# EAGLE board PCB-AAP-Robot-Schema pcb (EAGLE 9.2.2)
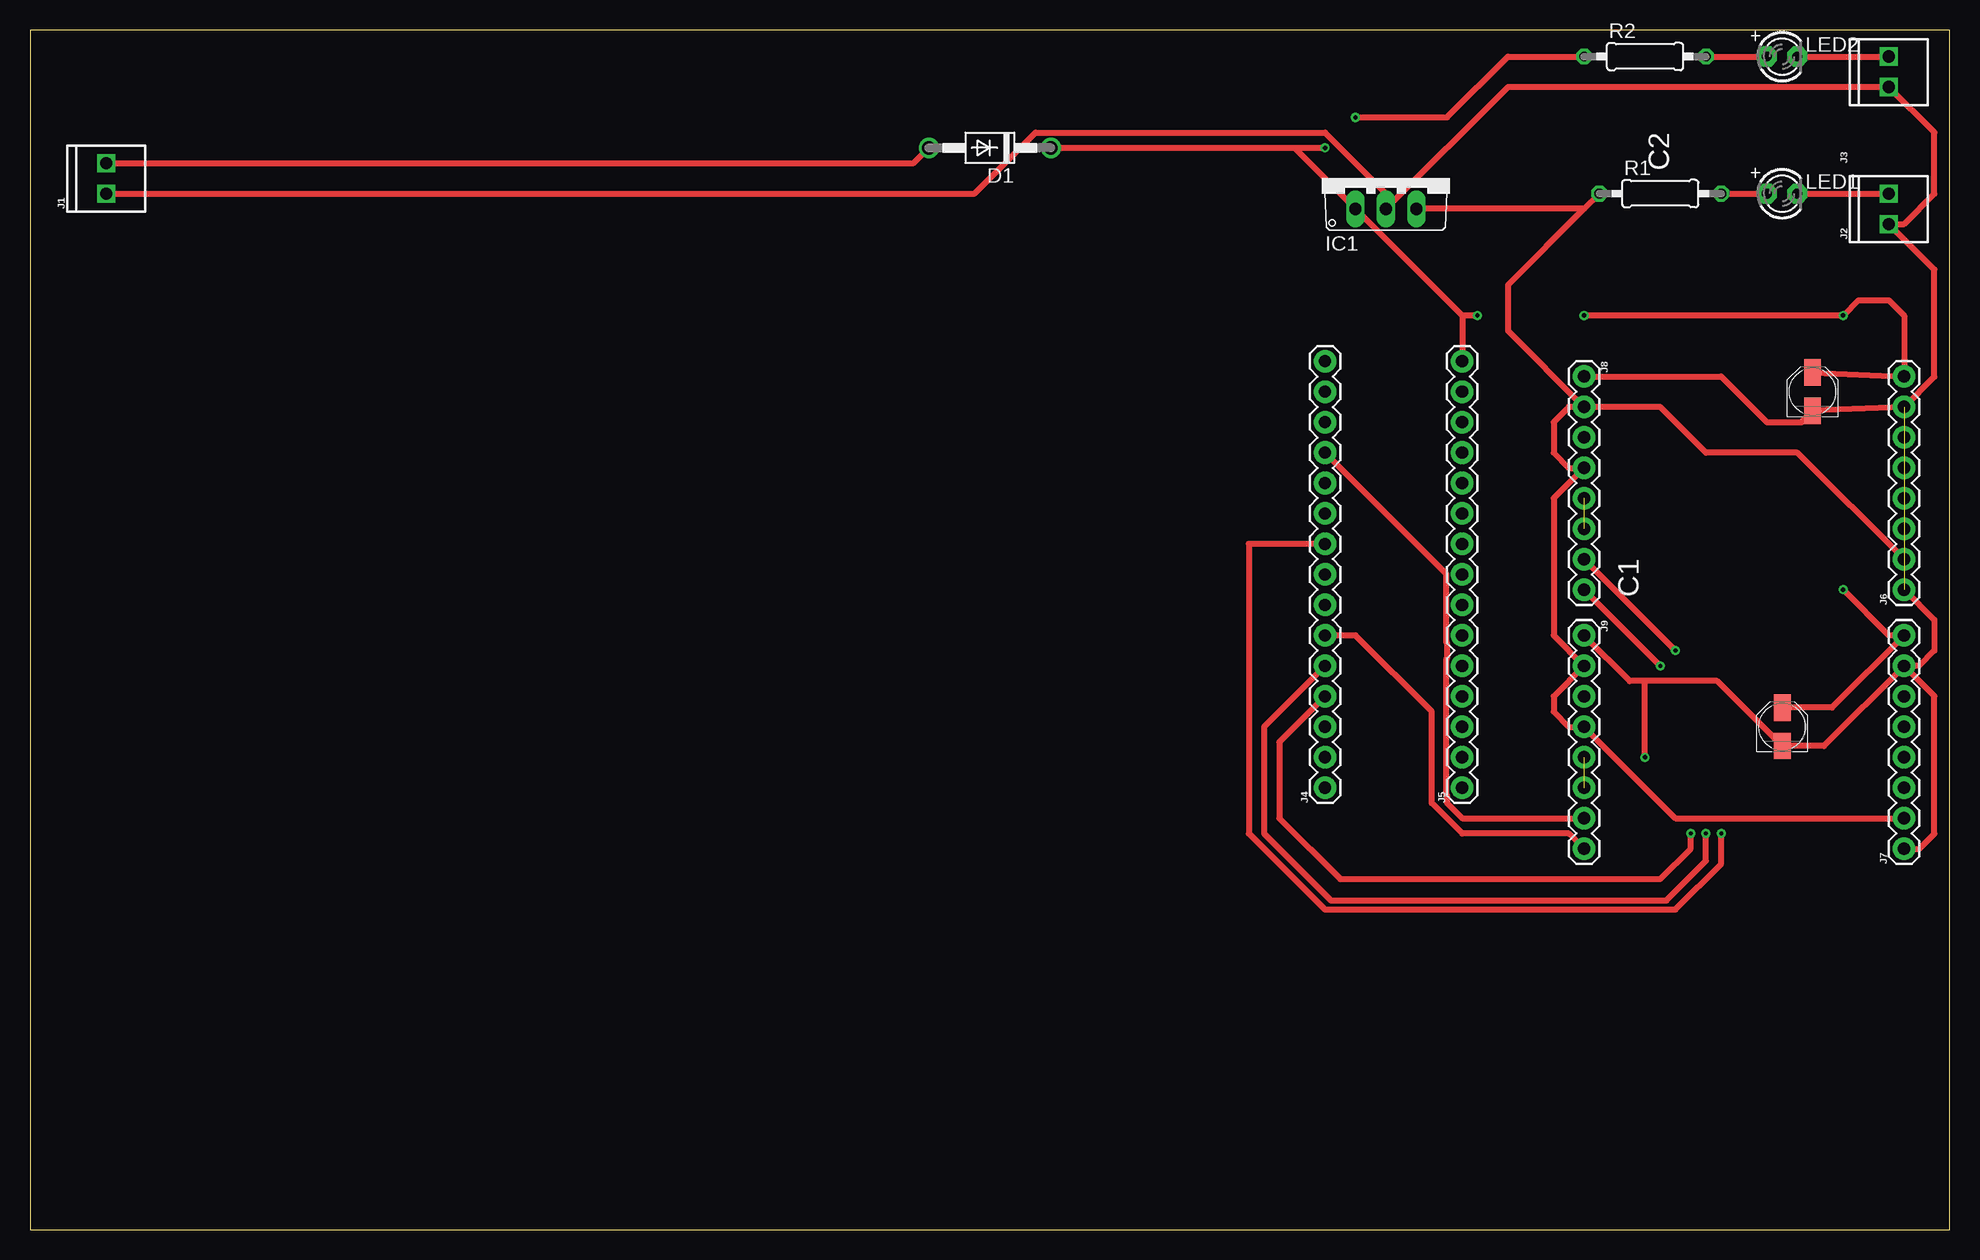
[diagram p0: board, top side]
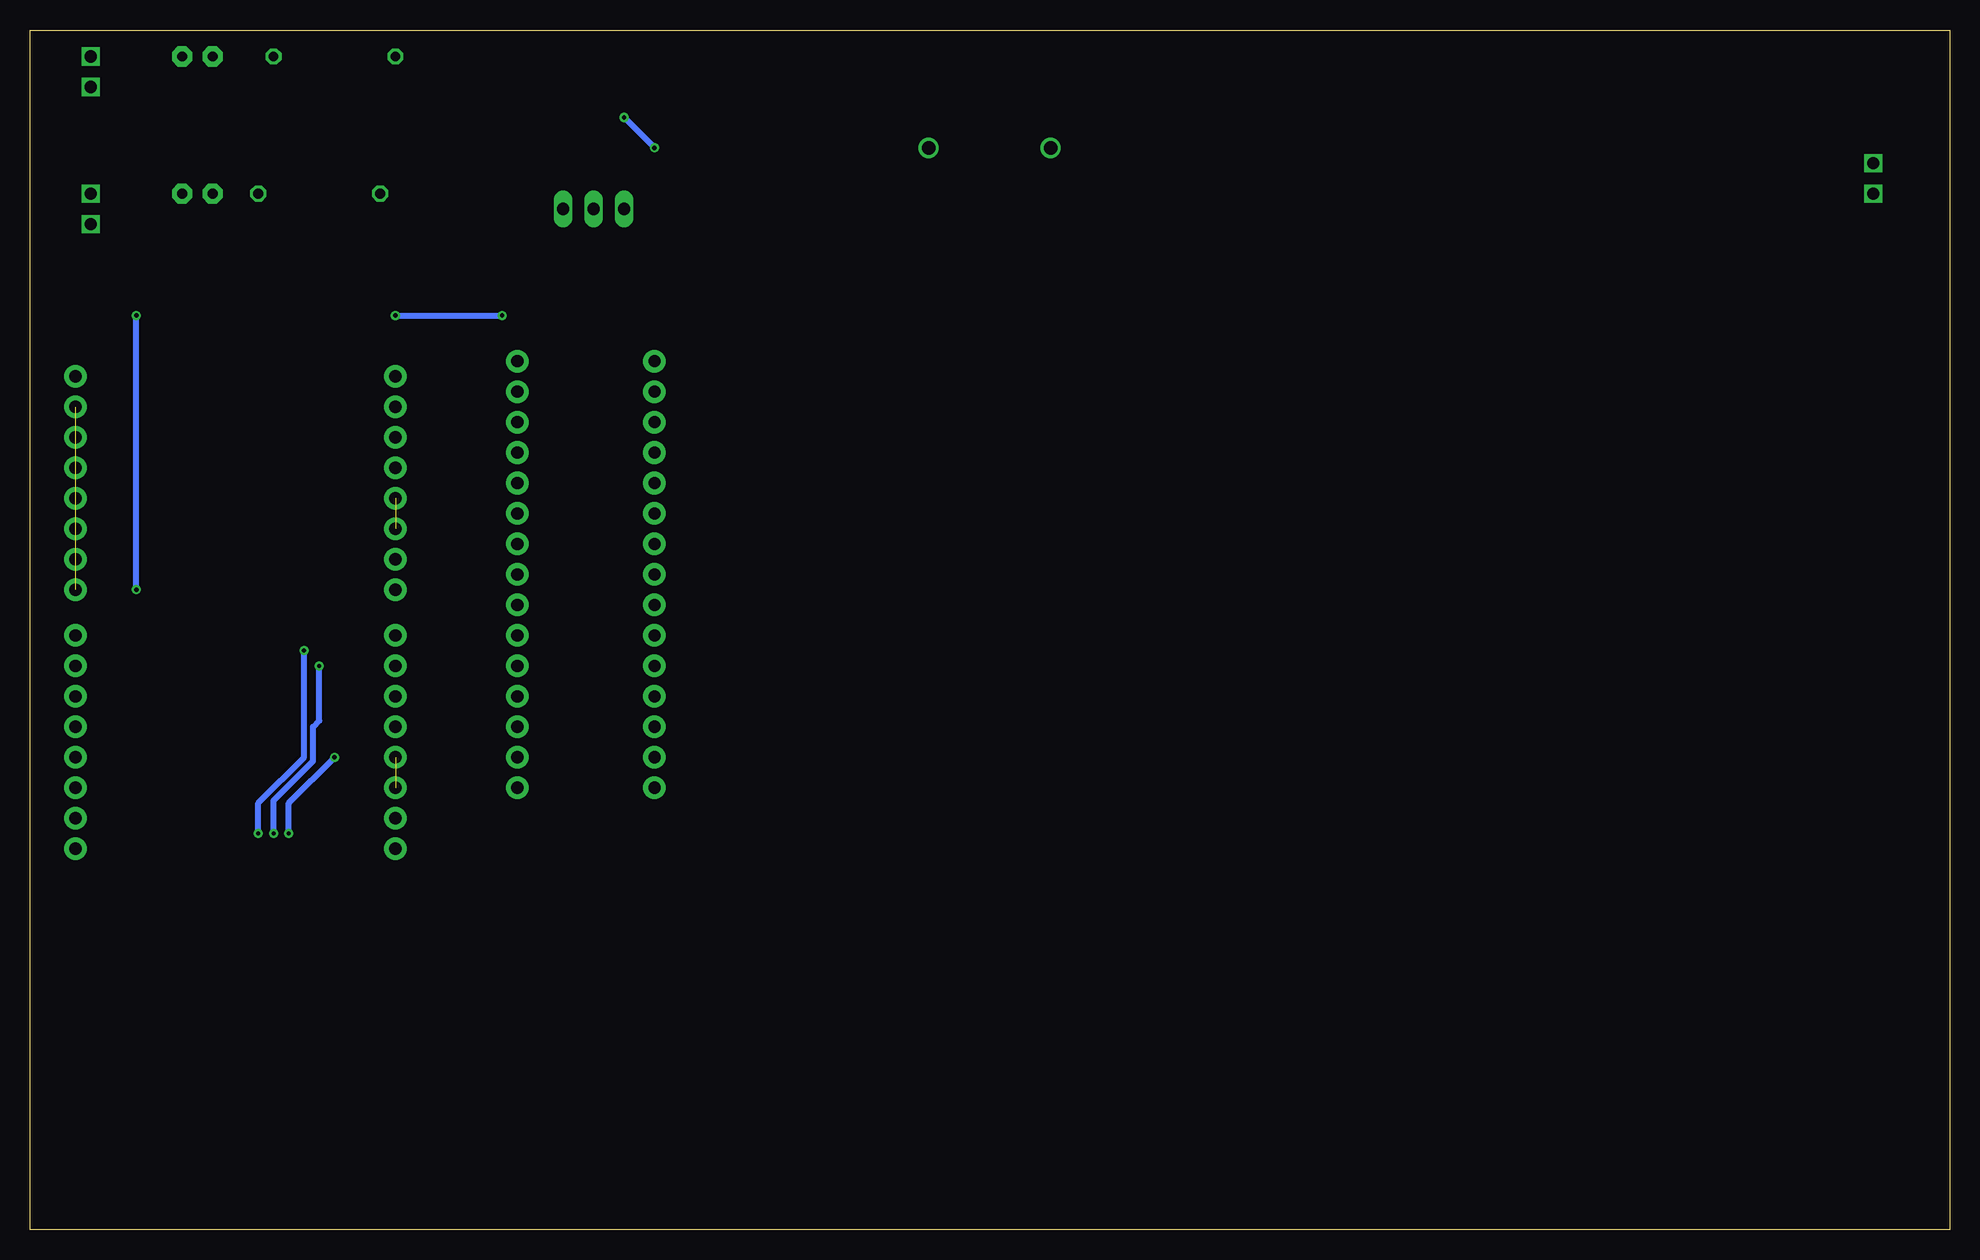
[diagram p1: board, bottom side, seen from below]

Size 160 x 100 mm. Coordinates in mm from the lower left corner, seen from the top.
Outline: 0,0 160,0 160,100 0,100 0,0
Copper layers (1*16): Top 0.035mm / dielectric 1.5mm / Bottom 0.035mm
Design rules "default *": minimum track width 20mil, minimum drill 0.35mm, track to track 10mil, track to pad 6mil, pad to pad 6mil, via to via 6mil, smd to smd 6mil, copper to edge 40mil, drill to drill 6mil, minimum pad ring 10mil, minimum via ring 8mil, stop-mask expansion 4mil, vias tented up to drill 0mil, thermal gap 10mil

## Footprints (pad centres in the part's own frame; a part is rotated, then mirrored left to right if it is on the bottom)
PANASONIC_B = smd 2.2 x 1.4: + 1.6,0; - -1.6,0
DO41-10 = drill 1.118: A 5.08,0; C -5.08,0
TO220V = drill 1.016 long: 1 -2.54,-2.54; 2 0,-2.54; 3 2.54,-2.54
1X02_2.54_SCREWTERM = drill 1.016 square: P1 2.54,0; P2 0,0
1X15 = drill 1.016 pad 1.88: 1 0,0; 2 2.54,0; 3 5.08,0; 4 7.62,0; 5 10.16,0; 6 12.7,0; 7 15.24,0; 8 17.78,0; 9 20.32,0; 10 22.86,0; 11 25.4,0; 12 27.94,0; 13 30.48,0; 14 33.02,0; 15 35.56,0
1X08 = drill 1.016 pad 1.88: 1 0,0; 2 2.54,0; 3 5.08,0; 4 7.62,0; 5 10.16,0; 6 12.7,0; 7 15.24,0; 8 17.78,0
LED3MM = drill 0.813 pad 1.676 octagon: A -1.27,0; K 1.27,0
0207/10 = drill 0.813 octagon: 1 -5.08,0; 2 5.08,0

## Placement (x,y rotation side)
C1  [PANASONIC_B]  146.05,41.91 90 top
C2  [PANASONIC_B]  148.59,69.85 90 top
D1  1N4004  [DO41-10]  80.01,90.17 180 top
IC1  7805TV  [TO220V]  113.03,87.63 0 top
J1  [1X02_2.54_SCREWTERM]  6.35,86.36 90 top
J2  [1X02_2.54_SCREWTERM]  154.94,83.82 90 top
J3  [1X02_2.54_SCREWTERM]  154.94,95.25 90 top
J4  [1X15]  107.95,36.83 90 top
J5  [1X15]  119.38,36.83 90 top
J6  [1X08]  156.21,53.34 90 top
J7  [1X08]  156.21,31.75 90 top
J8  [1X08]  129.54,71.12 270 top
J9  [1X08]  129.54,49.53 270 top
LED1  [LED3MM]  146.05,86.36 0 top
LED2  [LED3MM]  146.05,97.79 0 top
R1  [0207/10]  135.89,86.36 0 top
R2  [0207/10]  134.62,97.79 0 top

## Library data of the parts
C1 C2 R1 R2 = resistor
D1 = diode
IC1 = linear
J1-J5 = SparkFun-Connectors
J6-J9 = SparkFun-Connectors; PROD_ID: CONN-08438
LED1 LED2 = adafruit

## Nets
N$1: C1.+ C2.+ D1.C IC1.1 J5.15 J6.8 J7.8 R2.1
N$2: D1.A J1.P1
N$3: J4.6 J9.8
N$4: LED1.A R1.2
N$5: C1.- C2.- IC1.2 J1.P2 J2.P2 J3.P2 J4.4 J6.1 J6.7 J7.1 J7.7 J8.1 J9.1
N$6: J2.P1 LED1.K
N$8: J4.5 J8.8
N$9: J4.12 J9.7
N$10: J4.9 J8.7
N$11: J8.5 J8.6
N$12: J9.5 J9.6
N$13: LED2.A R2.2
N$14: IC1.3 J6.2 J7.2 J8.2 J8.4 J9.2 J9.4 R1.1
N$15: J3.P1 LED2.K

## Tracks (layer width: path | path; a pad name or v marks a point on that pad's centre or on a via)
N$1  (via drill 0.35)
  Top 0.508: C2.+ J6.8 156.21,76.2 154.94,77.47 152.4,77.47 v151.13,76.2 v129.54,76.2 | D1.C 105.41,90.17 | 105.41,90.17 IC1.1 119.38,76.2 | 119.38,76.2 J5.15 | C1.+ 150.19,43.51 J7.8 154.94,49.53 v151.13,53.34 | v120.65,76.2 119.38,76.2 | 105.41,90.17 v107.95,90.17 | v110.49,92.71 118.11,92.71 123.19,97.79 R2.1
  Bottom 0.508: v151.13,53.34 v151.13,76.2 | v129.54,76.2 v120.65,76.2 | v107.95,90.17 v110.49,92.71
N$2
  Top 0.508: J1.P1 73.66,88.9 D1.A
N$3
  Top 0.508: J9.8 128.27,33.02 119.38,33.02 116.84,35.56 116.84,43.18 110.49,49.53 J4.6
N$4
  Top 0.508: R1.2 LED1.A
N$5  (via drill 0.35)  (1 unrouted)
  Top 0.508: J1.P2 78.74,86.36 83.82,91.44 107.95,91.44 113.03,86.36 IC1.2 123.19,95.25 J3.P2 158.73,91.46 158.73,86.34 156.21,83.82 J2.P2 158.73,80.03 158.73,71.1 J6.7 148.6,68.25 | 148.6,68.25 C2.- | J8.1 140.97,71.12 144.78,67.31 147.66,67.31 148.6,68.25 | J6.1 158.73,50.82 158.73,48.26 157.46,46.99 J7.7 | J7.7 149.53,40.31 C1.- 140.64,45.72 134.62,45.72 | J9.1 133.35,45.72 134.62,45.72 | J7.1 157.48,31.75 158.73,33 158.73,44.47 J7.7 | J4.4 104.14,40.64 104.14,34.29 109.22,29.21 135.89,29.21 138.43,31.75 v138.43,33.02 | v134.62,39.37 134.62,45.72
  Bottom 0.508: v138.43,33.02 138.43,35.56 v134.62,39.37
N$6
  Top 0.508: LED1.K J2.P1
N$8  (via drill 0.35)
  Top 0.508: J4.5 102.87,41.91 102.87,33.02 108.46,27.43 136.4,27.43 139.7,30.73 v139.7,33.02 | v135.89,46.99 J8.8
  Bottom 0.508: v139.7,33.02 139.7,35.75 136.4,39.05 136.4,41.91 135.89,42.42 v135.89,46.99
N$9
  Top 0.508: J4.12 118.03,54.69 118.03,48.97 118.11,48.9 118.11,47.62 118.03,47.55 118.03,36.27 118.11,36.2 118.11,35.56 119.38,34.29 J9.7
N$10  (via drill 0.35)
  Top 0.508: J4.9 101.6,57.15 101.6,33.02 107.95,26.67 137.16,26.67 140.97,30.48 v140.97,33.02 | v137.16,48.26 J8.7
  Bottom 0.508: v140.97,33.02 140.97,35.56 137.16,39.37 v137.16,48.26
N$11  (1 unrouted)
N$12  (1 unrouted)
N$13
  Top 0.508: R2.2 LED2.A
N$14
  Top 0.508: R1.1 129.54,85.09 | 129.54,85.09 IC1.3 | 129.54,85.09 123.19,78.74 123.19,74.93 J8.2 | J8.2 128.27,68.58 127,67.31 127,64.77 128.27,63.5 J8.4 127,60.96 127,49.53 J9.2 127,44.45 127,43.18 128.27,41.91 J9.4 137.16,34.29 J7.2 | J6.2 147.32,64.77 139.7,64.77 135.89,68.58 J8.2
N$15
  Top 0.508: LED2.K J3.P1